# EAGLE board out-7.1+axp203 (EAGLE 6.0), part 1 of 3
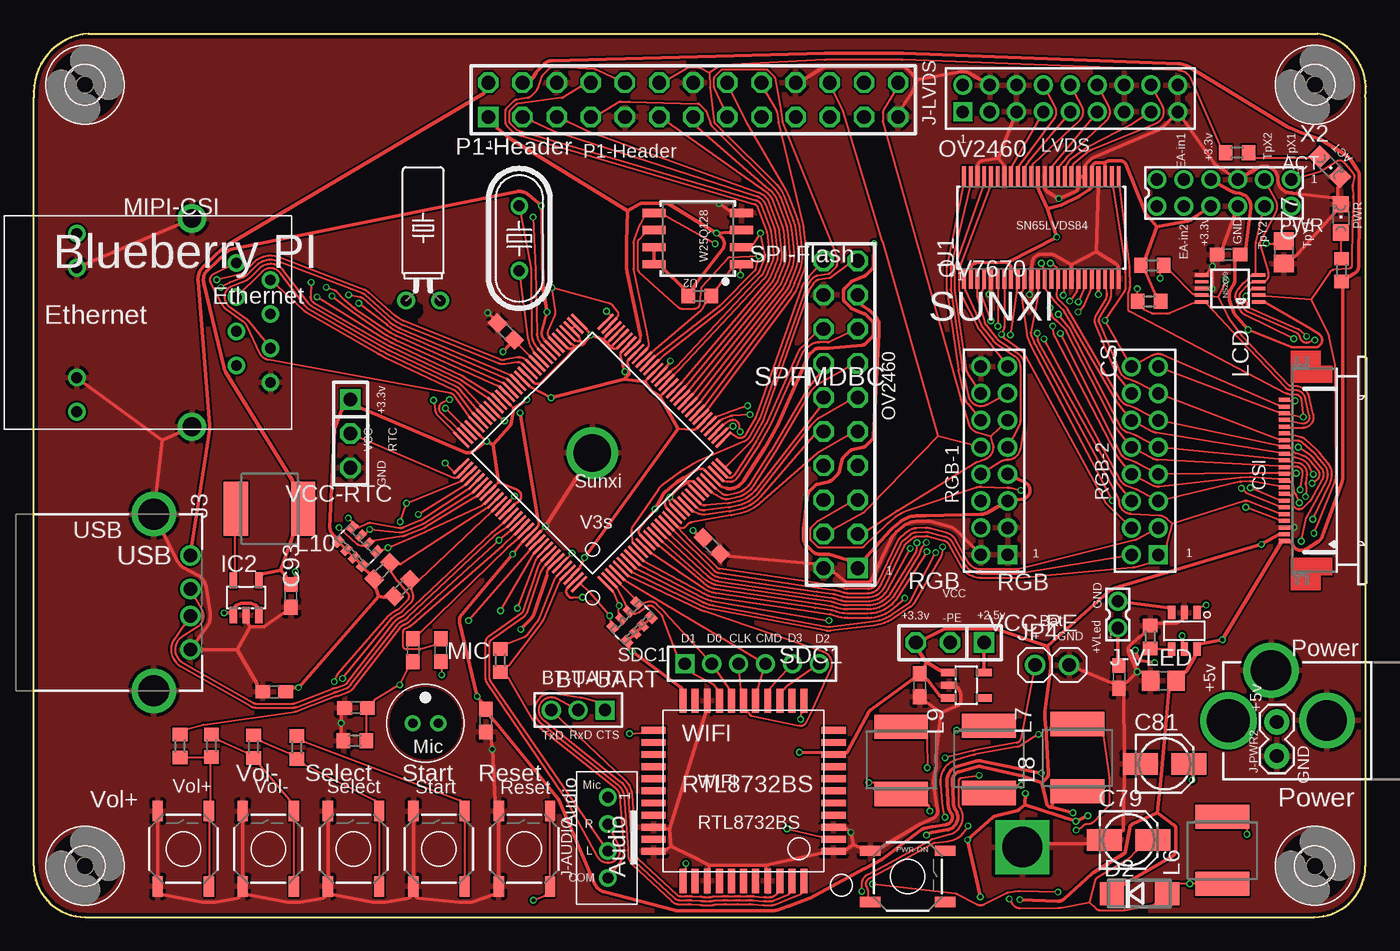
[diagram p0: board, top side]
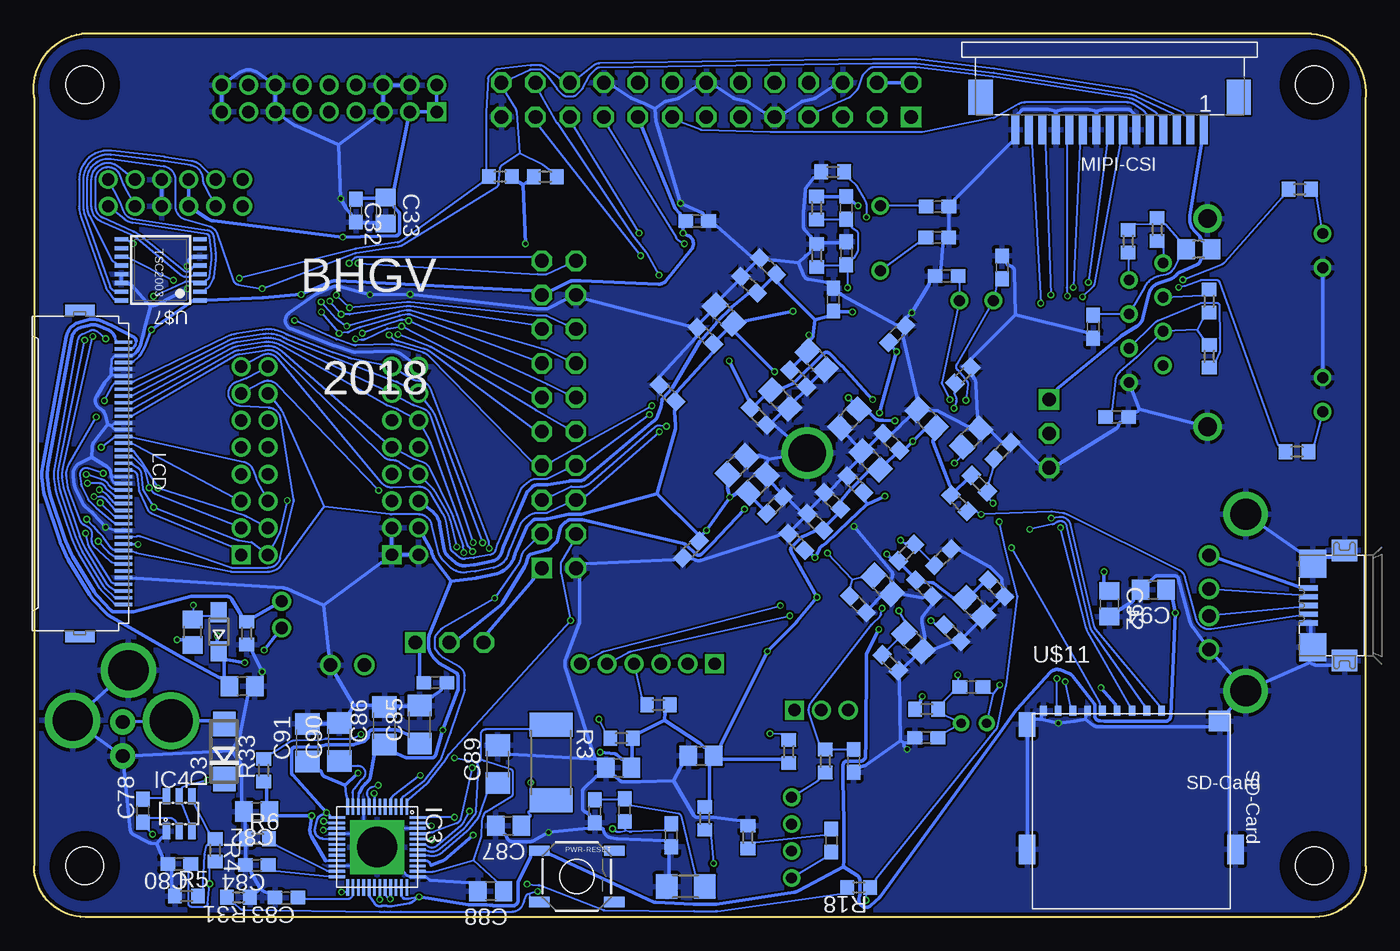
[diagram p1: board, bottom side, seen from below]

Size 99.11 x 65.7 mm. Coordinates in mm from the lower left corner, seen from the top.
Outline: 3.82,0 95.26,0 arc90 99.07,3.81 99.07,60.96 arc90 95.51,65.7 4.07,65.7 arc90 0.01,60.96 0.01,3.81 arc90 3.82,0
Copper layers 1+16: TOP 0.035mm / dielectric 0.15mm / BOTTOM 0.035mm
Design rules: minimum track width 0.1524mm, track to track 0.1524mm, copper to edge 0.254mm, minimum pad ring 0.1mm, minimum via ring 0.1mm
Net classes: 0 default_1: width 0.152 mm, clearance 0.152 mm; 1 default: width 0.152 mm, clearance 0.152 mm to class 0, clearance 0.152 mm; 2 pwr: width 0.178 mm, clearance 0.152 mm to class 0, clearance 0.3 mm to class 1, clearance 0.152 mm
tRestrict: area 26.6,44.3 to 28.9,46.1
vRestrict: area 26.6,44.3 to 28.9,46.1

## Footprints (pad centres in the part's own frame; a part is rotated, then mirrored left to right if it is on the bottom)
R1206 = smd 1.6 x 1.803: 1 -1.422,0; 2 1.422,0
C0603 = smd 1.1 x 1: 1 -0.85,0; 2 0.85,0
C0805 = smd 1.3 x 1.5: 1 -0.95,0; 2 0.95,0
C0805' = smd 1.3 x 1.5: 1 -0.85,0; 2 0.85,0
153CLV-0405 = smd 2.6 x 1.6: + 1.8,0; - -1.8,0
C1206 = smd 1.6 x 1.8: 1 -1.4,0; 2 1.4,0
SOD323-W = smd 1.5 x 1.2: A 1.45,0; C -1.45,0
DO214AC = smd 1.8 x 1.7: A 2.05,0; C -2.05,0
2,8 = hole 2.8: 0,0
SOT23-5L = smd 0.55 x 1.2: 1 -0.95,-1.3; 2 0,-1.3; 3 0.95,-1.3; 4 0.95,1.3; 5 -0.95,1.3
QFN48-6X6-H = smd 1.2 x 0.2: 1 -3,2.2; 2 -3,1.8; 3 -3,1.4; 4 -3,1; 5 -3,0.6; 6 -3,0.2; 7 -3,-0.2; 8 -3,-0.6; 9 -3,-1; 10 -3,-1.4; 11 -3,-1.8; 12 -3,-2.2; 25 3,-2.2; 26 3,-1.8; 27 3,-1.4; 28 3,-1; 29 3,-0.6; 30 3,-0.2; 31 3,0.2; 32 3,0.6; 33 3,1; 34 3,1.4; 35 3,1.8; 36 3,2.2 | smd 0.2 x 1.2: 13 -2.2,-3; 14 -1.8,-3; 15 -1.4,-3; 16 -1,-3; 17 -0.6,-3; 18 -0.2,-3; 19 0.2,-3; 20 0.6,-3; 21 1,-3; 22 1.4,-3; 23 1.8,-3; 24 2.2,-3; 37 2.2,3; 38 1.8,3; 39 1.4,3; 40 1,3; 41 0.6,3; 42 0.2,3; 43 -0.2,3; 44 -0.6,3; 45 -1,3; 46 -1.4,3; 47 -1.8,3; 48 -2.2,3 | drill 3 pad 4.016 square: P 0,0
SOT23-6L = smd 0.55 x 1.2: 1 -0.95,-1.3; 2 0,-1.3; 3 0.95,-1.3; 4 0.95,1.3; 5 0,1.3; 6 -0.95,1.3
USB-A-FEMALE = drill 1 pad 1.508: 1 -3.5,2.71; 2 -1,2.71; 3 1,2.71; 4 3.5,2.71 | drill 2.3 pad 3.316: P$1 6.57,0; P$2 -6.57,0
68611514122 = smd 0.6 x 2.2: 1 -7,2.4; 2 -6,2.4; 3 -5,2.4; 4 -4,2.4; 5 -3,2.4; 6 -2,2.4; 7 -1,2.4; 8 0,2.4; 9 1,2.4; 10 2,2.4; 11 3,2.4; 12 4,2.4; 13 5,2.4; 14 6,2.4; 15 7,2.4 | smd 1.8 x 2.6: Z1 -9.6,0; Z2 9.6,0
JST_B4B-PH_HEADER = drill 0.8 pad 1.308: P1 2.98,0.048; P2 0.98,0.048; P3 -1.02,0.048; P4 -3.02,0.048
52745-2290 = smd 0.3 x 0.8: 1 -5.25,2.5; 2 -4.75,2.5; 3 -4.25,2.5; 4 -3.75,2.5; 5 -3.25,2.5; 6 -2.75,2.5; 7 -2.25,2.5; 8 -1.75,2.5; 9 -1.25,2.5; 10 -0.75,2.5; 11 -0.25,2.5; 12 0.25,2.5; 13 0.75,2.5; 14 1.25,2.5; 15 1.75,2.5; 16 2.25,2.5; 17 2.75,2.5; 18 3.25,2.5; 19 3.75,2.5; 20 4.25,2.5; 21 4.75,2.5; 22 5.25,2.5
XF2H-4015-1LW = smd 1.3 x 0.25: 1 3.175,9.75; 2 3.175,9.25; 3 3.175,8.75; 4 3.175,8.25; 5 3.175,7.75; 6 3.175,7.25; 7 3.175,6.75; 8 3.175,6.25; 9 3.175,5.75; 10 3.175,5.25; 11 3.175,4.75; 12 3.175,4.25; 13 3.175,3.75; 14 3.175,3.25; 15 3.175,2.75; 16 3.175,2.25; 17 3.175,1.75; 18 3.175,1.25; 19 3.175,0.75; 20 3.175,0.25; 21 3.175,-0.25; 22 3.175,-0.75; 23 3.175,-1.25; 24 3.175,-1.75; 25 3.175,-2.25; 26 3.175,-2.75; 27 3.175,-3.25; 28 3.175,-3.75; 29 3.175,-4.25; 30 3.175,-4.75; 31 3.175,-5.25; 32 3.175,-5.75; 33 3.175,-6.25; 34 3.175,-6.75; 35 3.175,-7.25; 36 3.175,-7.75; 37 3.175,-8.25; 38 3.175,-8.75; 39 3.175,-9.25; 40 3.175,-9.75 | smd 2.2 x 0.8: M1 -0.075,12.15; M2 -0.075,-12.15
PINHEAD_2X09M = drill 0.914 pad 1.422 square: 1 -8,-1 | drill 0.914 pad 1.422: 2 -8,1; 3 -6,-1; 4 -6,1; 5 -4,-1; 6 -4,1; 7 -2,-1; 8 -2,1; 9 0,-1; 10 0,1; 11 2,-1; 12 2,1; 13 4,-1; 14 4,1; 15 6,-1; 16 6,1; 17 8,-1; 18 8,1
POWER_JACK_PTH_LOCK = drill 2.997 pad 4.115: GND 0.025,6.557; GNDBREAK 3.762,10.7 | drill 3.2 pad 4.216: PWR 0,13.878
1X02 = drill 1.016 pad 1.88: 1 0,0; 2 2.54,0
87758-0216 = drill 0.9 pad 1.408: 1 0,-1; 2 0,1
2X13 = drill 1.016 pad 1.524 square: 1 -15.24,-1.27 | drill 1.016 pad 1.524 octagon: 2 -15.24,1.27; 3 -12.7,-1.27; 4 -12.7,1.27; 5 -10.16,-1.27; 6 -10.16,1.27; 7 -7.62,-1.27; 8 -7.62,1.27; 9 -5.08,-1.27; 10 -5.08,1.27; 11 -2.54,-1.27; 12 -2.54,1.27; 13 0,-1.27; 14 0,1.27; 15 2.54,-1.27; 16 2.54,1.27; 17 5.08,-1.27; 18 5.08,1.27; 19 7.62,-1.27; 20 7.62,1.27; 21 10.16,-1.27; 22 10.16,1.27; 23 12.7,-1.27; 24 12.7,1.27; 25 15.24,-1.27; 26 15.24,1.27
1X06M = drill 0.914 pad 1.422 square: 1 -5,0 | drill 0.914 pad 1.422: 2 -3,0; 3 -1,0; 4 1,0; 5 3,0; 6 5,0
1X03 = drill 1.016 pad 1.524 square: 1 -2.54,0 | drill 1.016 pad 1.524 octagon: 2 0,0; 3 2.54,0
1X02' = drill 1.016 pad 1.524: 1 -1.27,0; 2 1.27,0
1X03M = drill 0.914 pad 1.422 square: 1 -2,0 | drill 0.914 pad 1.422: 2 0,0; 3 2,0
2X10 = drill 1.016 pad 1.524 square: 1 -11.43,-1.27 | drill 1.016 pad 1.524 octagon: 2 -11.43,1.27; 3 -8.89,-1.27; 4 -8.89,1.27; 5 -6.35,-1.27; 6 -6.35,1.27; 7 -3.81,-1.27; 8 -3.81,1.27; 9 -1.27,-1.27; 10 -1.27,1.27; 11 1.27,-1.27; 12 1.27,1.27; 13 3.81,-1.27; 14 3.81,1.27; 15 6.35,-1.27; 16 6.35,1.27; 17 8.89,-1.27; 18 8.89,1.27; 19 11.43,-1.27; 20 11.43,1.27
2X08M = drill 0.914 pad 1.422 square: 1 -7,-1 | drill 0.914 pad 1.422: 2 -7,1; 3 -5,-1; 4 -5,1; 5 -3,-1; 6 -3,1; 7 -1,-1; 8 -1,1; 9 1,-1; 10 1,1; 11 3,-1; 12 3,1; 13 5,-1; 14 5,1; 15 7,-1; 16 7,1
R0805 = smd 1.3 x 1.5: 1 -0.95,0; 2 0.95,0
L5650M = smd 1.8 x 4: 1 -2.5,0; 2 2.5,0
CHIPLED_0805 = smd 1.2 x 1.2: A 0,-1.05; C 0,1.05
F6035AP = drill 0.7 pad 1.208: 1 0,0.95; 2 0,-0.95
TACTILE-SWITCH-SMD = smd 1.524 x 0.762: 1 -2.794,1.905; 2 2.794,1.905; 3 -2.794,-1.905; 4 2.794,-1.905
HC49U-V = drill 0.813 pad 1.321: 1 -2.413,0; 2 2.413,0
TC38H = drill 0.813 pad 1.321: 1 -1.27,0; 2 1.27,0
R0603 = smd 1 x 1.1: 1 -0.85,0; 2 0.85,0
R2512 = smd 1.8 x 3.2: 1 -2.8,0; 2 2.8,0
EXB38V = smd 0.6 x 0.8: 1 -1.275,-0.75; 4 1.275,-0.75; 5 1.275,0.75; 8 -1.275,0.75 | smd 0.5 x 0.8: 2 -0.4,-0.75; 3 0.4,-0.75; 6 0.4,0.75; 7 -0.4,0.75
SPARKFUN-SWITCHES_TACTILE_SWITCH_SMD_5.2MM = smd 1.524 x 0.762: 1 -2.794,1.905; 2 2.794,1.905; 3 -2.794,-1.905; 4 2.794,-1.905
TFSOP-48-6.1MM = smd 1.5 x 0.29: 1 -3.8,5.75; 2 -3.8,5.25; 3 -3.8,4.75; 4 -3.8,4.25; 5 -3.8,3.75; 6 -3.8,3.25; 7 -3.8,2.75; 8 -3.8,2.25; 9 -3.8,1.75; 10 -3.8,1.25; 11 -3.8,0.75; 12 -3.8,0.25; 13 -3.8,-0.25; 14 -3.8,-0.75; 15 -3.8,-1.25; 16 -3.8,-1.75; 17 -3.8,-2.25; 18 -3.8,-2.75; 19 -3.8,-3.25; 20 -3.8,-3.75; 21 -3.8,-4.25; 22 -3.8,-4.75; 23 -3.8,-5.25; 24 -3.8,-5.75; 25 3.8,-5.75; 26 3.8,-5.25; 27 3.8,-4.75; 28 3.8,-4.25; 29 3.8,-3.75; 30 3.8,-3.25; 31 3.8,-2.75; 32 3.8,-2.25; 33 3.8,-1.75; 34 3.8,-1.25; 35 3.8,-0.75; 36 3.8,-0.25; 37 3.8,0.25; 38 3.8,0.75; 39 3.8,1.25; 40 3.8,1.75; 41 3.8,2.25; 42 3.8,2.75; 43 3.8,3.25; 44 3.8,3.75; 45 3.8,4.25; 46 3.8,4.75; 47 3.8,5.25; 48 3.8,5.75
SOIC-8 = smd 0.61 x 1.702: 1 -1.905,-3.251; 2 -0.635,-3.251; 3 0.635,-3.251; 4 1.905,-3.251; 5 1.905,3.251; 6 0.635,3.251; 7 -0.635,3.251; 8 -1.905,3.251
QFP-128 = smd 0.2 x 1.6: 1 -6.2,-7.6; 2 -5.8,-7.6; 3 -5.4,-7.6; 4 -5,-7.6; 5 -4.6,-7.6; 6 -4.2,-7.6; 7 -3.8,-7.6; 8 -3.4,-7.6; 9 -3,-7.6; 10 -2.6,-7.6; 11 -2.2,-7.6; 12 -1.8,-7.6; 13 -1.4,-7.6; 14 -1,-7.6; 15 -0.6,-7.6; 16 -0.2,-7.6; 17 0.2,-7.6; 18 0.6,-7.6; 19 1,-7.6; 20 1.4,-7.6; 21 1.8,-7.6; 22 2.2,-7.6; 23 2.6,-7.6; 24 3,-7.6; 25 3.4,-7.6; 26 3.8,-7.6; 27 4.2,-7.6; 28 4.6,-7.6; 29 5,-7.6; 30 5.4,-7.6; 31 5.8,-7.6; 32 6.2,-7.6; 65 6.2,7.6; 66 5.8,7.6; 67 5.4,7.6; 68 5,7.6; 69 4.6,7.6; 70 4.2,7.6; 71 3.8,7.6; 72 3.4,7.6; 73 3,7.6; 74 2.6,7.6; 75 2.2,7.6; 76 1.8,7.6; 77 1.4,7.6; 78 1,7.6; 79 0.6,7.6; 80 0.2,7.6; 81 -0.2,7.6; 82 -0.6,7.6; 83 -1,7.6; 84 -1.4,7.6; 85 -1.8,7.6; 86 -2.2,7.6; 87 -2.6,7.6; 88 -3,7.6; 89 -3.4,7.6; 90 -3.8,7.6; 91 -4.2,7.6; 92 -4.6,7.6; 93 -5,7.6; 94 -5.4,7.6; 95 -5.8,7.6; 96 -6.2,7.6 | smd 1.6 x 0.2: 33 7.6,-6.2; 34 7.6,-5.8; 35 7.6,-5.4; 36 7.6,-5; 37 7.6,-4.6; 38 7.6,-4.2; 39 7.6,-3.8; 40 7.6,-3.4; 41 7.6,-3; 42 7.6,-2.6; 43 7.6,-2.2; 44 7.6,-1.8; 45 7.6,-1.4; 46 7.6,-1; 47 7.6,-0.6; 48 7.6,-0.2; 49 7.6,0.2; 50 7.6,0.6; 51 7.6,1; 52 7.6,1.4; 53 7.6,1.8; 54 7.6,2.2; 55 7.6,2.6; 56 7.6,3; 57 7.6,3.4; 58 7.6,3.8; 59 7.6,4.2; 60 7.6,4.6; 61 7.6,5; 62 7.6,5.4; 63 7.6,5.8; 64 7.6,6.2; 97 -7.6,6.2; 98 -7.6,5.8; 99 -7.6,5.4; 100 -7.6,5; 101 -7.6,4.6; 102 -7.6,4.2; 103 -7.6,3.8; 104 -7.6,3.4; 105 -7.6,3; 106 -7.6,2.6; 107 -7.6,2.2; 108 -7.6,1.8; 109 -7.6,1.4; 110 -7.6,1; 111 -7.6,0.6; 112 -7.6,0.2; 113 -7.6,-0.2; 114 -7.6,-0.6; 115 -7.6,-1; 116 -7.6,-1.4; 117 -7.6,-1.8; 118 -7.6,-2.2; 119 -7.6,-2.6; 120 -7.6,-3; 121 -7.6,-3.4; 122 -7.6,-3.8; 123 -7.6,-4.2; 124 -7.6,-4.6; 125 -7.6,-5; 126 -7.6,-5.4; 127 -7.6,-5.8; 128 -7.6,-6.2 | drill 2.8 pad 3.816: P$1 0,0
LGA = smd 1.8 x 0.51: P$1 -0.7,10.5; P$2 -0.7,9.6; P$3 -0.7,8.7; P$4 -0.7,7.8; P$5 -0.7,6.9; P$6 -0.7,6; P$7 -0.7,5.1; P$8 -0.7,4.2; P$9 -0.7,3.3; P$10 -0.7,2.4; P$11 -0.7,1.5; P$23 12.7,1.5; P$24 12.7,2.4; P$25 12.7,3.3; P$26 12.7,4.2; P$27 12.7,5.1; P$28 12.7,6; P$29 12.7,6.9; P$30 12.7,7.8; P$31 12.7,8.7; P$32 12.7,9.6; P$33 12.7,10.5 | smd 0.51 x 1.8: P$12 1.5,-0.7; P$13 2.4,-0.7; P$14 3.3,-0.7; P$15 4.2,-0.7; P$16 5.1,-0.7; P$17 6,-0.7; P$18 6.9,-0.7; P$19 7.8,-0.7; P$20 8.7,-0.7; P$21 9.6,-0.7; P$22 10.5,-0.7; P$34 10.5,12.7; P$35 9.6,12.7; P$36 8.7,12.7; P$37 7.8,12.7; P$38 6.9,12.7; P$39 6,12.7; P$40 5.1,12.7; P$41 4.2,12.7; P$42 3.3,12.7; P$43 2.4,12.7; P$44 1.5,12.7
RJ45 = drill 0.8 pad 1.308: 1 -6.03,-4.12; 2 -8.57,-2.86; 3 -6.03,-1.58; 4 -8.57,-0.32; 5 -6.03,0.96; 6 -8.57,2.22; 7 -6.03,3.5; 8 -8.57,4.76; 9 5.84,-6.305; 10 5.84,-3.765; 11 5.84,4.405; 12 5.84,6.945 | drill 1.4 pad 2.1: SHIELD1 -2.73,-7.425; SHIELD2 -2.73,8.065
ZX62R-B-5P = smd 1.35 x 0.4: 1 2.675,-1.3; 2 2.675,-0.65; 3 2.675,0; 4 2.675,0.65; 5 2.675,1.3 | smd 1.9 x 1.6: M1 0,-4.1; M2 0,4.1 | smd 2 x 2.1: M3 2.35,3.1; M4 2.35,-3.1
SOT25 = smd 0.55 x 1.2: 1 -0.95,-1.3; 2 0,-1.3; 3 0.95,-1.3; 4 0.95,1.3; 5 -0.95,1.3
TSSOP16 = smd 0.305 x 0.991: 1 -2.275,-2.918; 2 -1.625,-2.918; 3 -0.975,-2.918; 4 -0.325,-2.918; 5 0.325,-2.918; 6 0.975,-2.918; 7 1.625,-2.918; 8 2.275,-2.918; 9 2.275,2.918; 10 1.625,2.918; 11 0.975,2.918; 12 0.325,2.918; 13 -0.325,2.918; 14 -0.975,2.918; 15 -1.625,2.918; 16 -2.275,2.918
MSOP10 = smd 0.25 x 1: 1 -1,-2.113; 2 -0.5,-2.113; 3 0,-2.113; 4 0.5,-2.113; 5 1,-2.113; 6 1,2.113; 7 0.5,2.113; 8 0,2.113; 9 -0.5,2.113; 10 -1,2.113
SOT23-6 = smd 1 x 0.55: 1 -1.35,0.95; 2 -1.35,0; 3 -1.35,-0.95; 4 1.35,-0.95; 5 1.35,0; 6 1.35,0.95
MICROSD-PUSH-OUT = smd 0.5 x 0.75: 1 9.625,0.225; 2 8.525,0.225; 3 7.425,0.225; 4 6.325,0.225; 5 5.225,0.225; 6 4.125,0.225; 7 3.025,0.225; 8 1.925,0.225; CD 0.825,0.225 | smd 1.2 x 1.8: G1 -0.375,-0.8 | smd 1.2 x 2.2: G2 -0.375,-10.1; G4 15.125,-10.1 | smd 1.6 x 1.5: G3 13.95,-0.55
87758-1216 = drill 0.9 pad 1.408: 1 -5,-1; 2 -5,1; 3 -3,-1; 4 -3,1; 5 -1,-1; 6 -1,1; 7 1,-1; 8 1,1; 9 3,-1; 10 3,1; 11 5,-1; 12 5,1

## Placement (x,y rotation side)
ANT1  [R1206]  50.6,2.28 0 bottom
C1  100nF  [C0603]  49.74,51.77 0 bottom
C2  100nF  [C0603]  88.89,49.26 180 top
C3  10µF  [C0805]  55.59,11.1 180 bottom
C4  1µF  [C0603]  55.14,7.96 90 bottom
C5  1µF  [C0603]  51.69,6.09 270 bottom
C6  1µF  [C0603]  57.36,7.88 270 bottom
C7  10µF  [C0805]  29.38,35.66 45 bottom
C8  18pF  [C0603]  27.07,48.31 90 bottom
C9  100nF  [C0603]  17.9,16.76 180 top
C10  18pF  [C0603]  31.19,47.67 180 bottom
C11  18pF  [C0603]  31.86,52.83 180 bottom
C12  18pF  [C0603]  31.89,50.54 180 bottom
C13  1µF  [C0603]  27.05,34.68 45 bottom
C14  100nF  [C0603]  38.67,52.74 90 bottom
C15  100nF  [C0603]  38.65,49.37 270 bottom
C16  10µF  [C0805]  29.13,23.06 135 bottom
C17  1µF  [C0603]  38.11,11.62 270 bottom
C18  100nF  [C0603]  39.76,5.7 270 bottom
C19  100nF  [C0603]  27.49,24.46 135 bottom
C20  10µF  [C0805]  33.66,20.45 135 bottom
C21  1µF  [C0603]  30.75,21.11 135 bottom
C22  100nF  [C0603]  37.77,23.25 315 bottom
C23  33pF  [C0603]  32.7,13.34 0 bottom
C24  33pF  [C0603]  23.98,15.56 0 top
C25  100pF  [C0603]  29.34,17.11 180 bottom
C26  33pF  [C0603]  33.64,14.62 90 top
C27  100nF  [C0603]  30.3,19.85 270 top
C28  100nF  [C0603]  28.23,19.84 270 top
C29  10µF  [C0805]  35.95,24.71 135 bottom
C30  10µF  [C0805]  49.45,11.99 180 bottom
C31  100nf  [C0603]  65.92,17.24 270 top
C32  1µF  [C0603]  75.12,52.54 270 bottom
C33  10µF  [C0805]  72.92,52.55 270 bottom
C34  1nF  [C0603]  31.48,26.76 225 bottom
C38  10µF  [C0603]  45.89,47.04 315 bottom
C39  1µF  [C0603]  42.23,40.05 315 bottom
C47  1µF  [C0603]  44.47,48.41 135 bottom
C48  100nF  [C0603]  18.51,37.19 0 bottom
C49  100nF  [C0603]  20.29,43.9 270 bottom
C50  100nF  [C0805]  40.86,41.4 315 bottom
C51  100nF  [C0603]  39.61,45.92 90 bottom
C52  100nF  [C0805]  47.75,44.81 135 bottom
C53  100nF  [C0603]  49.14,43.23 135 bottom
C54  1µF  [C0805]  45.27,32.21 45 bottom
C55  1µF  [C0603]  50.45,27.61 315 top
C56  10µF  [C0603]  42.37,27.9 135 bottom
C57  100nF  [C0603]  40.95,29.39 135 bottom
C58  100nF  [C0603]  35.29,35.33 135 bottom
C59  1µF  [C0805]  36.84,33.96 135 bottom
C60  10µF  [C0603]  39.67,30.95 135 bottom
C61  1µF  [C0805]  43.58,38.5 315 bottom
C62  100nF  [C0603]  37.98,32.19 135 bottom
C63  100nF  [C0805]  46.78,33.6 45 bottom
C64  1µF  [C0603]  51.96,38.96 135 bottom
C65  1µF  [C0603]  43.96,30.63 45 bottom
C66  10µF  [C0805]  38.42,37.07 225 bottom
C67  100nF  [C0603]  50.2,27.33 225 bottom
C68  100nF  [C0603]  32.86,24.45 315 bottom
C69  100nF  [C0805]  32.68,37.06 135 bottom
C70  100nF  [C0603]  45.19,37.23 315 bottom
C71  10µF  [C0603]  34.87,43.36 45 bottom
C72  100nF  [C0603]  35.12,43.55 135 top
C73  10µF  [C0805]  84.04,17.58 180 top
C74  10µF  [C0805]  83.6,17.17 0 bottom
C75  100nf  [C0603]  80.73,17.86 270 top
C76  100nf  [C0603]  69.23,17.43 0 bottom
C77  [C0805']  93.01,49.44 270 top
C78  100n  [C0603]  90.98,7.91 90 bottom
C79  220u  [153CLV-0405]  81.45,5.74 0 top
C80  100n  [C0603]  88.27,3.96 180 bottom
C81  47u/25V  [153CLV-0405]  84.13,11.4 0 top
C82  10u  [C0805]  82.52,7.85 180 bottom
C83  100n  [C0603]  80.31,1.44 180 bottom
C84  100n  [C0603]  82.5,3.86 180 bottom
C85  47u  [C1206]  70.39,14.32 90 bottom
C86  47u  [C1206]  73.01,14.24 90 bottom
C87  10u  [C0805]  63.79,6.78 180 bottom
C88  10u  [C0805]  65.1,1.93 180 bottom
C89  47u  [C1206]  64.58,11.38 90 bottom
C90  47u  [C1206]  76.36,13.02 90 bottom
C91  47u  [C1206]  78.74,12.96 90 bottom
C92  10u  [C0805]  19.09,23.29 270 bottom
C93  100n  [C0603]  19.14,23.89 270 top
C94  10u  [C0805]  15.82,24.35 180 bottom
D1  [SOD323-W]  85.33,21.22 90 bottom
D2  SS14  [DO214AC]  82.26,1.74 0 top
D3  SS34  [DO214AC]  84.92,12.32 90 bottom
H1  [2,8]  95.31,3.81 0 top
H2  [2,8]  3.82,3.81 0 top
H3  [2,8]  3.82,61.9 0 top
H4  [2,8]  95.31,61.9 0 top
IC2  LM3671MF-1.8  [SOT23-5L]  15.81,23.76 0 top
IC3  AXP203H  [QFN48-6X6-H]  73.55,5.21 270 bottom
IC4  TPS562200DBV  [SOT23-6L]  88.28,7.7 0 bottom
J3  USB-A-FEMALE  [USB-A-FEMALE]  8.95,23.39 270 top
J4  [68611514122]  19.06,60.96 180 bottom
J-AUDIO  JST-PH_4-PIN_HEADER  [JST_B4B-PH_HEADER]  42.77,5.93 90 top
J-CAM-FFC  52745-2290  [52745-2290]  95.54,33.22 90 top
J-LCD-FFC  [XF2H-4015-1LW]  95.59,33 0 bottom
J-LVDS  [PINHEAD_2X09M]  77.12,60.88 0 top
J-PWR  POWER_JACKPTH_LOCK  [POWER_JACK_PTH_LOCK]  102.76,14.6 90 top
J-PWR2  [1X02]  92.48,11.97 90 top
J-VLED  87758-0216  [87758-0216]  80.66,22.5 0 top
JP1  [2X13]  49.07,60.78 0 top
JP2  [1X06M]  53.45,18.84 0 top
JP3  [1X03]  68.17,20.41 180 top
JP4  [1X02']  75.76,18.75 0 top
JP5  [1X03]  23.57,35.95 270 top
JP7  [1X03M]  40.51,15.4 180 top
JP10  OV2640  [2X10]  60.03,37.38 90 top
JP11  [2X08M]  82.67,33.94 90 top
JP12  [2X08M]  71.46,33.94 90 top
L1  2,2µH  [R0805]  87.29,21.2 90 bottom
L2  10µH  [R0805]  12.43,49.66 180 bottom
L6  4.7u  [L5650M]  88.43,4.97 90 top
L7  4.7u  [L5650M]  71.06,11.73 270 top
L8  4.7u  [L5650M]  77.65,11.86 90 top
L9  4.7u  [L5650M]  64.53,11.66 270 top
L10  4.7u  [L5650M]  17.56,30.37 180 top
LED1  [CHIPLED_0805]  97.25,51.96 0 top
LED2  [CHIPLED_0805]  96.42,55.8 225 top
MIC  [F6035AP]  29.15,14.41 90 top
PWR-ON  Power  [TACTILE-SWITCH-SMD]  65.03,3.02 0 top
PWR-RESET  Power  [TACTILE-SWITCH-SMD]  58.7,3.03 0 bottom
Q1  24Mhz  [HC49U-V]  36.13,50.47 270 top
Q2  32kHz  [TC38H]  28.98,45.85 0 top
R1  47k  [R0603]  25.93,25.74 225 top
R2  47k  [R0603]  27.42,24.48 225 top
R3  30m  [R2512]  60.63,11.5 270 bottom
R4  11k  [R0603]  85.6,4.97 270 bottom
R5  2k  [R0603]  87.73,1.57 0 bottom
R6  200k  [R0603]  82.45,5.84 0 bottom
R8  10k  [R0603]  49.54,46.18 0 top
R9  100k  [R0603]  55.37,13.3 180 bottom
R10  100k  [R0603]  49.18,7.35 90 bottom
R11  47k  [R0603]  28.75,32.24 135 bottom
R12  240 - 1%  [R0603]  39.66,55.42 180 bottom
R13  2k - 1%  [R0603]  40.86,52.73 90 bottom
R14  2k - 1%  [R0603]  40.85,49.2 270 bottom
R15  22  [R0603]  45.97,5.94 270 bottom
R16  1k  [R0603]  97.3,48.11 270 top
R17  1k  [R0603]  89.52,56.85 180 top
R18  [R0603]  37.72,2.21 180 bottom
R19  10k  [R0603]  42.93,12.31 270 bottom
R20  6k8  [R0603]  10.89,12.72 90 top
R21  8k2  [R0603]  13.23,12.75 270 top
R22  10k  [R0603]  16.36,12.67 270 top
R23  11k  [R0603]  19.58,12.62 270 top
R24  6k 1%  [R0603]  29.97,40.29 45 bottom
R25  2k  [R0603]  40.22,11.6 90 bottom
R26  0  [R0603]  34.71,19.09 270 top
R27  200k 1%  [R0603]  35.38,18.91 135 bottom
R28  2k  [R0603]  23.9,13.12 180 top
R29  47k  [R0603]  34.18,27.11 225 bottom
R30  2k  [R0603]  32.67,15.46 180 bottom
R31  4.7k  [R0603]  83.87,1.47 180 bottom
R32  47k  [R0603]  30.25,30.79 315 bottom
R33  4.7k  [R0603]  81.99,10.92 90 bottom
R36  47k  [R0603]  52.63,15.78 180 bottom
R38  10k  [R0603]  82.99,45.79 180 top
R39  10k  [R0603]  83.22,48.47 0 top
R40  49.9  [R0603]  11.67,45.81 270 bottom
R41  49.9  [R0603]  11.65,41.71 90 bottom
R42  49.9  [R0603]  15.53,51.12 90 bottom
R43  49.9  [R0603]  17.69,50.26 90 bottom
R44  10k  [R0603]  61.05,55.05 0 bottom
R45  10k  [R0603]  64.4,55.07 180 bottom
R46  10k  [R0603]  83.06,20.83 90 top
R47  [R0603]  83.26,21.11 270 bottom
R52  1k  [R0603]  5.12,34.61 0 bottom
R53  1k  [R0603]  4.92,54.12 0 bottom
RN1  [EXB38V]  44.51,21.92 45 top
RN2  [EXB38V]  24.09,27.56 315 top
S-RST  [SPARKFUN-SWITCHES_TACTILE_SWITCH_SMD_5.2MM]  36.5,5.08 90 top
S-SEL  [SPARKFUN-SWITCHES_TACTILE_SWITCH_SMD_5.2MM]  23.8,5.08 90 top
S-START  [SPARKFUN-SWITCHES_TACTILE_SWITCH_SMD_5.2MM]  30.15,5.08 90 top
S-VOL+  [SPARKFUN-SWITCHES_TACTILE_SWITCH_SMD_5.2MM]  11.15,5.08 90 top
S-VOL-  [SPARKFUN-SWITCHES_TACTILE_SWITCH_SMD_5.2MM]  17.45,5.08 90 top
U1  SN65LVDS84AQDGGRQ1  [TFSOP-48-6.1MM]  74.96,51.27 90 top
U2  W25Q32FV  [SOIC-8]  49.41,50.46 90 top
U$1  [QFP-128]  41.57,34.52 45 top
U$2  [LGA]  58.81,15.39 180 top
U$3  [RJ45]  9.05,44.52 180 top
U$5  [ZX62R-B-5P]  1.59,23.17 180 bottom
U$6  XC6204  [SOT25]  69.38,17.24 270 top
U$7  TSC2003  [TSSOP16]  89.66,48.13 90 bottom
U$8  NS2009  [MSOP10]  89,46.75 90 top
U$9  [SOT23-6]  85.6,21.29 270 top
U$11  MICROSD-PUSH-OUT  [MICROSD-PUSH-OUT]  24.82,15.13 0 bottom
X2  87758-1216  [87758-1216]  88.57,53.85 180 top

## Library data of the parts
ANT1 C1-C34 C38 C39 C47-C76 C78-C94 L1 L2 L6-L10 R1-R6 R8-R33 R36 R38-R47 R52 R53 = rcl
C77 = resistor
D1-D3 = diode
H1 H2 H4 = holes
H3 = holes@1
IC2-IC4 U$1 = Allwinner V3s
J3 = Connectors
J4 = EAGLE-FPC_CONNECTOR_AND_FFC_CAB-rev16b
J-AUDIO = srg
J-CAM-FFC = con-molex; OC_FARNELL: unknown; OC_NEWARK: unknown
J-LCD-FFC = adafruit
J-LVDS = Blueberry Pi
J-PWR = SparkFun-Connectors; PROD_ID: CONN-08197; SF_ID: PRT-00119
J-PWR2 = SparkFun-Connectors
J-VLED = con-molex; MPN: 87758-0216; OC_FARNELL: unknown; OC_NEWARK: 94M1513
JP1 JP3-JP5 JP7 JP10-JP12 = pinhead
JP2 = pinhead-1
LED1 LED2 = led
MIC = microphon
PWR-ON PWR-RESET = SparkFun-Electromechanical; PROD_ID: SWCH-08247
Q1 = crystal; OC_FARNELL: 1666969; OC_NEWARK: unknown
Q2 = crystal; OC_FARNELL: unknown; OC_NEWARK: unknown
RN1 RN2 = resistor-dil; OC_FARNELL: unknown; OC_NEWARK: unknown
S-RST S-SEL S-START S-VOL+ S-VOL- = Blueberry Pi; PROD_ID: SWCH-08247; SF_SKU: COM-08720
U1 = TI
U2 = SparkFun-IC-Memory; PROD_ID: IC-13229
U$2 = RTL8723BS_Modul
U$3 = HR911105A
U$5 = con-hirose
U$6 = XC6204
U$7 = tsc2003
U$8 = NS2009
U$9 = PT4101
U$11 = microsd
X2 = con-molex; MPN: 87758-1216; OC_FARNELL: unknown; OC_NEWARK: 25M5671

## Nets
!IRQ [default]: IC3.48 R33.2
!RESET: C13.1 R11.1 R18.1 S-RST.3 S-RST.4 U$1.99
!VBUSEN [default]: IC3.6
+1V2 [pwr]: C52.1 C53.1 C54.1 C55.1 C56.1 C62.1 C63.1 C64.1 C65.1 C66.1 C67.1 C86.1 IC3.10 JP12.4 L7.1 U$1.19 U$1.20 U$1.21 U$1.25 U$1.26 U$1.38 U$1.47 U$1.51 U$1.56 U$1.58 U$1.64 U$1.80 U$1.88 U$1.108 U$1.126
+1V8 [pwr]: C14.2 C38.2 C39.1 C47.1 C50.1 C51.1 C92.1 C93.1 IC2.4 JP12.6 L10.1 R13.2 U$1.59 U$1.60 U$1.61 U$1.62 U$1.65 U$1.66 U$1.67 U$1.68 U$1.69 U$1.70 U$1.72 U$1.79
+2V5 [pwr]: C76.1 JP3.1 U$6.5
+3V3 [pwr]: C1.1 C2.1 C3.1 C9.1 C30.1 C31.1 C32.1 C33.1 C57.1 C58.1 C59.1 C60.1 C61.1 C69.1 C70.1 C85.1 IC3.13 IC3.17 IC3.40 J4.1 J-CAM-FFC.2 J-LCD-FFC.4 J-LCD-FFC.31 J-LVDS.1 J-LVDS.2 J-LVDS.3 JP1.1 JP1.17 JP3.3 JP5.1 JP10.1 JP10.17 JP12.5 JP12.7 L2.1 L8.1 R1.2 R2.2 R8.1 R9.1 R10.2 R11.2 R19.2 R32.1 R36.1 R38.1 R39.1 RN1.1 RN1.2 RN1.3 RN1.4 RN2.1 RN2.2 RN2.3 RN2.4 U1.2 U1.8 U1.21 U1.27 U1.29 U1.37 U2.3 U2.7 U2.8 U$1.50 U$1.57 U$1.85 U$1.93 U$1.104 U$1.109 U$1.127 U$2.P$9 U$2.P$22 U$6.1 U$6.3 U$7.1 U$8.1 U$11.4 X2.7 X2.8
+3V3A [pwr]: C16.2 C19.2 C26.2 C68.1 C71.1 C72.1 C91.1 IC3.12 R29.2 R30.2 U$1.76 U$1.115
+5V [pwr]: C73.1 D2.C IC3.31 J3.1 J-CAM-FFC.1 JP1.2 JP1.4 L1.1 R16.2 U$5.1 U$9.6
BT_H_WK [default]: U$2.P$7
BT_WK [default]: U$2.P$6
CLK_N [default]: J-LVDS.15 U1.33
CLK_P [default]: J-LVDS.16 U1.32
CSI_D0/LCD_D2 [default]: J-CAM-FFC.14 J-LCD-FFC.23 JP10.20 JP11.12 U1.13 U$1.33
CSI_D1/LCD_D3 [default]: J-CAM-FFC.15 J-LCD-FFC.24 JP10.19 JP11.11 U1.15 U$1.32
CSI_D2/LCD_D4 [default]: J-CAM-FFC.12 J-LCD-FFC.25 JP10.16 JP11.10 U1.16 U$1.31
CSI_D3/LCD_D5 [default]: J-CAM-FFC.13 J-LCD-FFC.26 JP10.15 JP11.9 U1.18 U$1.30
CSI_D4/LCD_D6 [default]: J-CAM-FFC.10 J-LCD-FFC.27 JP10.14 JP11.8 U1.19 U$1.28
CSI_D5/LCD_D7 [default]: J-CAM-FFC.11 J-LCD-FFC.28 JP10.13 JP11.7 U1.20 U$1.27
CSI_D6/LCD_D10 [default]: J-CAM-FFC.8 J-LCD-FFC.15 JP10.12 JP11.6 U1.4 U$1.24
CSI_D7/LCD_D11 [default]: J-CAM-FFC.9 J-LCD-FFC.16 JP10.11 JP11.5 U1.6 U$1.23
CSI_D8/LCD_D12 [default]: J-CAM-FFC.6 J-LCD-FFC.17 JP10.10 JP11.4 U1.7 U$1.22
CSI_D9/LCD_D13 [default]: J-CAM-FFC.7 J-LCD-FFC.18 JP10.9 JP11.3 U1.9 U$1.18
CSI_D10/LCD_D14 [default]: J-CAM-FFC.4 J-LCD-FFC.19 JP11.2 U1.10 U$1.17
CSI_D11/LCD_D15 [default]: J-CAM-FFC.5 J-LCD-FFC.20 JP11.1 U1.12 U$1.16
CSI_D12/LCD_D18 [default]: J-CAM-FFC.22 J-LCD-FFC.7 JP12.15 U1.44 U$1.15
CSI_HSYNC/LCD_HSYNC [default]: J-CAM-FFC.17 J-LCD-FFC.32 JP10.6 JP11.14 U1.22 U$1.35
CSI_MCLK/LCD_DE [default]: J-CAM-FFC.20 J-LCD-FFC.34 JP10.8 JP11.15 U1.25 U$1.36
CSI_PCLK/LCD_CLK [default]: J-CAM-FFC.21 J-LCD-FFC.30 JP10.7 JP11.16 U1.26 U$1.37
CSI_VSYNC/LCD_VSYNC [default]: J-CAM-FFC.16 J-LCD-FFC.33 JP10.5 JP11.13 U1.23 U$1.34
EA-IN1 [default]: U$7.16 X2.9
EA-IN2 [default]: U$7.15 X2.10
EPHY_RXN [default]: R41.1 U$1.89 U$3.6
EPHY_RXP [default]: R40.1 U$1.90 U$3.3
EPHY_TXN [default]: R43.1 U$1.91 U$3.2
EPHY_TXP [default]: R42.1 U$1.92 U$3.1
GND [pwr]: ANT1.1 C1.2 C2.2 C3.2 C5.2 C6.2 C7.2 C8.2 C9.2 C10.2 C11.1 C12.1 C13.2 C15.1 C16.1 C17.2 C19.1 C20.1 C21.1 C22.2 C23.1 C24.1 C26.1 C29.1 C30.2 C31.2 C32.2 C33.2 C34.1 C38.1 C39.2 C47.2 C48.2 C49.2 C50.2 C51.2 C52.2 C53.2 C54.2 C55.2 C56.2 C57.2 C58.2 C59.2 C60.2 C61.2 C62.2 C63.2 C64.2 C65.2 C66.2 C67.2 C68.2 C69.2 C70.2 C71.2 C72.2 C73.2 C74.2 C75.2 C76.2 C77.2 C79.- C80.2 C81.- C82.2 C83.2 C84.2 C85.2 C86.2 C87.2 C88.2 C89.2 C90.2 C91.2 C92.2 C93.2 C94.2 IC2.2 IC3.9 IC3.16 IC3.22 IC3.37 IC3.46 IC3.P IC4.1 J3.4 J3.P$1 J3.P$2 J4.6 J4.9 J4.12 J4.15 J-CAM-FFC.3 J-LCD-FFC.3 J-LCD-FFC.5 J-LCD-FFC.6 J-LCD-FFC.13 J-LCD-FFC.14 J-LCD-FFC.21 J-LCD-FFC.22 J-LCD-FFC.29 J-LCD-FFC.36 J-LVDS.4 J-LVDS.5 J-LVDS.6 J-LVDS.13 J-LVDS.14 J-LVDS.17 J-LVDS.18 J-PWR2.1 J-PWR.GND J-PWR.GNDBREAK JP1.6 JP1.9 JP1.14 JP1.20 JP1.25 JP4.2 JP5.3 JP10.2 JP10.18 JP12.1 JP12.2 JP12.3 JP12.16 LED1.C LED2.C PWR-ON.1 R5.1 R6.1 R12.2 R14.1 R15.1 R24.2 R27.1 R28.2 R31.1 R46.2 R47.2 S-RST.1 S-RST.2 S-SEL.1 S-SEL.2 S-START.1 S-START.2 S-VOL+.1 S-VOL+.2 S-VOL-.1 S-VOL-.2 U1.5 U1.11 U1.17 U1.24 U1.28 U1.30 U1.31 U1.36 U1.42 U1.46 U2.4 U$1.116 U$1.P$1 U$2.P$1 U$2.P$3 U$2.P$20 U$2.P$31 U$2.P$33 U$2.P$36 U$2.P$41 U$3.8 U$3.10 U$3.11 U$3.SHIELD1 U$3.SHIELD2 U$5.5 U$5.M1 U$5.M2 U$5.M3 U$5.M4 U$6.2 U$7.6 U$7.13 U$7.14 U$8.6 U$8.8 U$9.2 U$11.6 U$11.CD U$11.G1 U$11.G2 U$11.G3 U$11.G4 X2.5 X2.6
HP_COM [default]: C18.2 J-AUDIO.P4 R26.2 U$1.125
HP_COMFB [default]: R26.1 U$1.124
HP_L [default]: J-AUDIO.P3 U$1.121
HP_R [default]: J-AUDIO.P2 U$1.120
I2C0/SCL [default]: JP1.5 U$1.45
I2C0/SDA [default]: JP1.3 U$1.46
I2C1/SCL [default]: IC3.2 J4.3 J-CAM-FFC.19 JP1.26 JP10.3 JP12.11 R38.2 R44.2 U$1.9 U$7.12 U$8.10
I2C1/SDA [default]: IC3.1 J4.2 J-CAM-FFC.18 JP1.22 JP10.4 JP12.10 R39.2 R45.2 U$1.8 U$7.11 U$8.9
KEYADC0 [default]: C34.2 R20.2 R29.1 U$1.112
LCD_D19 [default]: J-LCD-FFC.8 JP12.14 U1.45 U$1.14
LCD_D20 [default]: J-LCD-FFC.9 JP12.13 U1.47 U$1.13
LCD_D21 [default]: J-LCD-FFC.10 JP12.12 U1.48 U$1.11
LCD_D22 [default]: J-LCD-FFC.11 JP12.9 U1.1 U$1.7
LCD_D23 [default]: J-LCD-FFC.12 JP12.8 U1.3 U$1.6
LINK_LED [default]: R53.1 U$1.77
MCSI-CK_N [default]: J4.8 U$1.87
MCSI-CK_P [default]: J4.7 U$1.86
MCSI-D0_N [default]: J4.14 U$1.82
MCSI-D0_P [default]: J4.13 U$1.81
MCSI-D1_N [default]: J4.11 U$1.84
MCSI-D1_P [default]: J4.10 U$1.83
MIC_HBIAS [default]: C17.1 R25.2 U$1.119
MIC_HBIAS_O [default]: J-AUDIO.P1 R25.1
MICIN1N [default]: C28.1 U$1.114
MICIN1P [default]: C27.1 U$1.113
MIPI-CSI-MCLK [default]: J4.5 JP1.15 U$1.10
N$1 [default]: R24.1 U$1.94
N$3 [default]: LED1.A R16.1
N$4 [default]: R19.1 U$2.P$23
N$5 [default]: C79.+ C80.1 D2.A IC3.32 IC3.33 L6.1 R4.2
N$6 [default]: LED2.A R17.1
N$7 [default]: R9.2 U$2.P$12
N$8 [default]: R20.1 R21.2 S-VOL+.3 S-VOL+.4
N$9 [default]: R46.1 U$9.4
N$10 [default]: D1.A L1.2 U$9.1
N$11 [default]: C77.1 U$7.9
N$12 [default]: R10.1 U$2.P$34
N$13 [default]: C4.1 C5.1 U$2.P$2
N$14 [default]: ANT1.2 C4.2 C6.1
N$15 [default]: C78.1 IC4.2 L6.2
N$16 [default]: C78.2 IC4.6
N$17 [default]: IC4.4 R4.1 R5.2
N$18 [default]: R53.2 U$3.9
N$19 [default]: C81.+ D3.C IC4.3 IC4.5
N$20 [default]: R52.2 U$3.12
N$21 [default]: C49.1 L2.2 R42.2 R43.2 U$3.4
N$22 [default]: C48.1 R40.2 R41.2 U$3.5
N$23 [default]: C7.1 U$1.97
N$24 [default]: IC3.23 R6.2
N$25 [default]: C83.1 IC3.26 IC3.27
N$26 [default]: JP5.2 U$1.98
N$27 [default]: C84.1 IC3.24
N$28 [default]: C22.1 C29.2 U$1.123
N$29 [default]: C10.1 Q2.2 U$1.95
N$30 [default]: C8.1 Q2.1 U$1.96
N$31 [default]: IC3.8 L7.2
N$32 [default]: C11.2 Q1.1 U$1.74
N$33 [default]: C12.2 Q1.2 U$1.75
N$34 [default]: IC3.15 L8.2
N$36 [default]: R12.1 U$1.73
N$37 [default]: C87.1 IC3.43 L9.2 R3.2
N$38 [default]: IC3.45 L9.1
N$39 [default]: C88.1 IC3.38 IC3.39 IC3.42 JP4.1 R3.1
N$40 [default]: IC3.47 PWR-ON.3
N$41 [default]: R21.1 R22.2 S-VOL-.3 S-VOL-.4
N$42 [default]: R22.1 R23.2 S-SEL.3 S-SEL.4
N$43 [default]: R23.1 S-START.3 S-START.4
N$44 [default]: C89.1 IC3.41
N$45 [default]: C90.1 IC3.11
N$46 [default]: IC3.4 PWR-RESET.3 R31.2
N$47 [default]: C18.1 R15.2
N$48 [default]: C23.2 C25.2 C27.2 MIC.2 R30.1
N$49 [default]: C24.2 C25.1 C28.2 MIC.1 R28.1
N$50 [default]: IC3.25 R18.2
N$51 [default]: IC2.5 L10.2
N$61 [default]: JP7.1 U$2.P$44
N$62 [default]: JP7.2 U$2.P$43
N$63 [default]: JP7.3 U$2.P$42
PB2 [default]: JP1.12 R17.2 U$1.41
PB3 [default]: J4.4 JP1.7 U$1.42
PB4/PWM0 [default]: JP1.13 U$1.43
PB5/PWM1 [default]: JP1.11 U$1.44
SDC0/CLK [default]: RN2.5 U$1.105 U$11.5
SDC0/CMD [default]: RN2.6 U$1.103 U$11.3
SDC0/D0 [default]: R1.1 U$1.106 U$11.7
SDC0/D1 [default]: R2.1 U$1.107 U$11.8
SDC0/D2 [default]: RN2.8 U$1.101 U$11.1
SDC0/D3 [default]: RN2.7 U$1.102 U$11.2
SDC1/CLK [default]: JP2.3 U$1.5 U$2.P$17
SDC1/CMD [default]: JP2.4 R36.2 U$1.4 U$2.P$16
SDC1/D0 [default]: JP2.2 RN1.5 U$1.3 U$2.P$18
SDC1/D1 [default]: JP2.1 RN1.6 U$1.2 U$2.P$19
SDC1/D2 [default]: JP2.6 RN1.7 U$1.1 U$2.P$14
SDC1/D3 [default]: JP2.5 RN1.8 U$1.128 U$2.P$15
SPD_LED [default]: R52.1 U$1.78
SPI1/CS [default]: JP1.24 R8.2 U2.1 U$1.54
SPI1/MISO [default]: JP1.21 U2.2 U$1.52
SPI1/MOSI [default]: JP1.19 U2.5 U$1.55
SPI1/SCK [default]: JP1.23 U2.6 U$1.53
SVREF [default]: C14.1 C15.2 R13.1 R14.2 U$1.63 U$1.71
TPX1 [default]: J-LCD-FFC.37 U$7.2 U$8.2 X2.1
TPX2 [default]: J-LCD-FFC.39 U$7.4 U$8.4 X2.3
TPY1 [default]: J-LCD-FFC.38 U$7.3 U$8.3 X2.2
TPY2 [default]: J-LCD-FFC.40 U$7.5 U$8.5 X2.4
UART0/RX [default]: JP1.10 U$1.49
UART0/TX [default]: JP1.8 U$1.48
UART2/RX/PB1 [default]: JP1.16 U$1.40
UART2/TX/PB0 [default]: JP1.18 U$1.39
USB/ID [default]: R32.2 U$1.100 U$5.4
USB_D_N [default]: J3.2 U$1.110 U$5.2
USB_D_P [default]: J3.3 U$1.111 U$5.3
V_INPUT [pwr]: D3.A J-PWR2.2 J-PWR.PWR
VBACKUP [pwr]: IC3.28
VCC-PE [pwr]: JP3.2 R44.1 R45.1 U$1.12 U$1.29
VDD [pwr]: C82.1 C94.1 IC2.1 IC2.3 IC3.7 IC3.14 IC3.21 IC3.29 IC3.34 IC3.35 IC3.44 PWR-RESET.1 R33.1 U$1.122
VLED+ [pwr]: C74.1 C75.1 D1.C J-LCD-FFC.2 J-VLED.1 U$9.5
VLED- [pwr]: J-LCD-FFC.1 J-VLED.2 R47.1 U$9.3
VRA1 [default]: C21.2 U$1.117
VRA2 [default]: C20.2 R27.2 U$1.118
WL_H_WK [default]: U$2.P$13
Y0_N [default]: J-LVDS.7 U1.41
Y0_P [default]: J-LVDS.8 U1.40
Y1_N [default]: J-LVDS.9 U1.39
Y1_P [default]: J-LVDS.10 U1.38
Y2_N [default]: J-LVDS.11 U1.35
Y2_P [default]: J-LVDS.12 U1.34

## Tracks (layer width: path | path; a pad name or v marks a point on that pad's centre or on a via)
!IRQ  (via drill 0.3 pad 0.5)
  TOP 0.152: v74.76,13.59 73.42,12.75 arc-22 73.18,12.66 70.06,12.1 arc6 69.9,12.06 68.68,11.71 arc9 68.43,11.62 68.37,11.59 arc58 67.46,10.32 67.45,10.25 arc7 67.44,10.06 67.44,10.03 arc6 67.45,9.86 67.58,8.53 arc0 67.58,8.52 67.62,8.17 arc9 67.66,7.96 v67.81,7.42
  BOTTOM 0.152: v67.81,7.42 69.95,7.42 70.03,7.42 IC3.48 | R33.2 81.52,12.19 81.45,12.19 arc-31 81.41,12.2 80.05,13.03 arc30 79.66,13.15 77.96,13.19 arc-3 77.94,13.19 77.81,13.2 arc-6 77.78,13.2 77.42,13.27 arc10 77.27,13.28 77.26,13.28 77.2,13.28 arc1 77.18,13.28 77.14,13.28 75.59,13.28 75.55,13.28 arc1 75.53,13.28 75.47,13.28 arc-27 75.32,13.32 v74.76,13.59
!RESET  (via drill 0.3 pad 0.5)
  TOP 0.152: v37.18,1.26 38,1.59 arc-23 38.03,1.6 38.11,1.6 S-RST.3 38.41,2.97 38.41,3.05 38.41,7.11 38.41,7.19 S-RST.4 | v27.27,29.39 v27.74,30.78 31.77,32.4 arc22 31.79,32.42 31.85,32.47 U$1.99
  BOTTOM 0.152: v37.18,1.26 37.18,1.66 37.18,1.74 R18.1 36.45,2.68 36.45,2.76 arc39 36.43,2.81 27.55,13.89 arc-27 27.39,14.24 26.77,17.17 arc-5 26.76,17.21 25.92,23.79 arc-22 25.93,23.88 26.82,27.34 arc2 26.83,27.36 v27.27,29.39 | C13.1 27.69,33.45 27.75,33.39 27.75,33.39 arc-27 27.76,33.36 28.04,32.36 arc27 28.06,32.33 28.11,32.27 R11.1 28.07,31.11 28.02,31.06 v27.74,30.78
+1V2  (via drill 0.3 pad 0.5)
  TOP 0.178: U$1.51 45.67,40.04 45.49,39.82 | U$1.26 49.06,32.4 49.02,32.41 arc14 49,32.42 48.87,32.43 arc30 48.75,32.41 48.62,32.34 48.68,32.25 arc12 48.77,32.13 48.77,32.12 48.78,32.12 U$1.25 | U$1.108 35.49,30.99 35.5,31 v35.78,31.31 | U$1.20 47.37,30.7 47.35,30.75 47.3,30.95 arc-38 v47.32,31.23 | v47.32,31.23 v47.32,31.23 arc102 47.01,30.56 47.08,30.42 U$1.19 | U$1.88 34.64,37.21 34.64,37.2 34.65,37.2 34.65,37.2 arc6 34.68,37.18 v35.03,36.9 | U$1.56 44.26,41.45 44.25,41.45 arc59 44.18,41.16 44.32,40.64 arc-38 44.3,40.42 44.3,40.41 | 46.59,38.7 46.8,38.91 U$1.47 | U$1.21 47.65,30.99 47.64,30.99 arc7 47.59,31.03 v47.32,31.23 | U$1.126 40.58,25.89 40.58,25.9 arc20 40.66,26.01 v40.98,26.74 | U$1.64 42.97,44.71 42.91,44.77 v42.62,45.06 | U$1.80 36.9,39.47 37,39.4 arc8 37.08,39.35 v38.49,38.62 | U$1.38 49.35,36.36 49.34,36.36 49.34,36.35 49.34,36.35 arc-47 49.06,36.25 47.93,36.32 | U$1.58 43.69,42.02 43.68,41.98 arc14 43.67,41.95 43.66,41.83 arc17 43.67,41.76 43.81,41.1 arc7 43.83,41.02 v43.98,40.55
  TOP 0.254: C55.1 49.43,28.39 49.34,28.48 v49.06,28.76 | 43.92,40.01 45.49,39.82 45.88,39.23 arc11 45.94,39.17 46,39.1 arc11 46.07,39.05 46.59,38.7 47.93,36.32 v40.98,26.74 | 48.62,32.34 48.06,31.98 arc12 47.98,31.93 47.84,31.78 arc2 47.84,31.77 v47.32,31.23 | v38.49,38.62 43.92,40.01 | L7.1 69.19,13.91 69.06,13.91 v68.67,13.91 | v43.98,40.55 44.3,40.41 44.29,40.41 arc-20 44.22,40.31 43.92,40.01
  BOTTOM 0.178: IC3.10 74.95,8.8 74.88,9.23
  BOTTOM 0.254: C62.1 37.35,31.03 37.26,30.94 37.25,30.94 arc7 37.24,30.93 37.09,30.71 | C52.1 47.51,43.69 47.6,43.59 48.2,42.99 48.29,42.9 C53.1 48.5,42.07 48.59,41.98 48.6,41.97 51.3,39.01 51.39,38.92 C64.1 51.32,37.8 51.41,37.7 51.41,37.7 arc-48 51.45,37.6 51.35,36.56 arc21 51.37,36.31 52.72,31.49 | v38.49,38.62 38.21,38.34 38.12,38.25 C66.1 37.02,37.58 36.93,37.49 36.56,37.12 arc-44 36.2,36.96 35.92,36.96 35.91,36.95 v35.03,36.9 | v43.98,40.55 46.86,43.43 46.95,43.52 C52.1 | C65.1 44.79,30.32 44.88,30.41 45.44,30.97 45.53,31.06 C54.1 46.75,31.61 46.84,31.52 46.84,31.52 arc13 46.86,31.5 v47.32,31.23 | v35.78,31.31 37.09,30.71 | 37.09,30.71 37.14,30.66 arc5 37.15,30.65 38.44,29.43 40.12,27.84 arc10 40.16,27.81 40.43,27.63 arc-31 40.67,27.36 40.77,27.14 40.78,27.13 v40.98,26.74 41.26,27.02 41.35,27.11 C56.1 | v42.62,45.06 46.11,44.33 arc-31 46.17,44.3 46.26,44.21 C52.1 | JP12.4 69.6,27.44 arc18 69.49,27.15 69.49,27.13 arc-25 69.14,26.37 68.07,24.98 | 52.72,31.49 49.74,28.51 49.65,28.42 C67.1 49.44,28.38 49.35,28.46 v49.06,28.76 v47.32,31.23 | 74.88,9.23 74.62,9.68 arc21 74.39,9.95 74.37,9.96 arc-42 74.03,10.56 73.79,12.02 arc-9 73.79,12.04 73.79,12.16 C86.1 72.24,12.16 72.11,12.16 arc24 72.06,12.15 71.4,11.86 arc-24 71.29,11.84 69.49,11.84 arc-73 69.22,12.04 v68.67,13.91 67.56,16.83 arc-21 67.55,16.93 67.55,17.93 arc-60 67.69,18.17 68.93,18.89 arc15 69.11,19.03 69.25,19.16 arc11 69.36,19.3 69.58,19.64 arc34 69.72,20.08 69.72,20.75 arc22 69.66,21.04 68.07,24.98 | v47.32,31.23 47.5,31.91 arc58 47.47,32.03 47.38,32.12 C63.1 | 68.07,24.98 66.21,25.21 arc-5 66.05,25.24 64.81,25.5 arc-65 63.3,26.97 63.3,27 arc11 63.22,27.22 62.45,28.97 arc21 62.36,29.1 62,29.47 arc37 61.76,29.59 61.66,29.6 arc8 61.62,29.6 60.98,29.6 arc-12 60.85,29.62 59.33,29.94 arc12 59.16,29.96 59.08,29.96
  BOTTOM 0.254: 59.08,29.96 | 59.08,29.96 58.44,29.96 arc-15 58.37,29.97 52.72,31.49
+1V8  (via drill 0.3 pad 0.5)
  TOP 0.178: 42.67,42.65 42.84,42.87 U$1.61 | U$1.65 41.14,43.71 v41.44,43.29 | U$1.72 38.03,42.87 38.03,42.87 arc-2 38.01,42.89 38.01,42.89 arc-58 37.83,43.64 v38.2,45 | U$1.68 40.3,42.87 40.34,42.85 arc14 40.36,42.85 40.49,42.84 arc7 40.52,42.84 40.66,42.84 40.6,43.1 40.59,43.11 40.58,43.15 U$1.67 40.02,43.72 40.08,43.78 40.23,43.93 40.29,43.99 U$1.66 | U$1.60 43.12,42.58 43.12,42.58 arc12 43.06,42.49 42.97,42.35 43.09,42.29 arc30 43.21,42.27 43.34,42.28 arc14 43.37,42.29 43.41,42.3 U$1.59 | U$1.62 42.56,43.15 42.4,42.92 | U$1.70 39.73,42.3 39.77,42.29 arc14 39.79,42.28 39.92,42.27 arc28 40.04,42.29 40.34,42.42 40.01,42.58 U$1.69 | U$1.79 37.18,39.75 37.19,39.75 37.19,39.75 arc66 37.59,39.67 37.81,39.76
  TOP 0.254: v38.2,45 37.89,46.69 arc-10 37.88,46.8 37.83,52.07 arc3 37.83,52.1 v37.77,52.91 36.84,53.71 arc52 35.91,53.95 14.87,49.7 arc32 14.35,49.43 12.94,48.12 arc60 12.66,47.17 14.18,40.81 arc18 14.29,40.53 19.26,32.44 arc-32 19.28,32.37 19.28,32.24 L10.1 19.28,28.5 19.28,28.37 arc-19 19.28,28.33 18.38,25.79 | 40.89,42.65 40.66,42.84 | 37.81,39.76 39.82,41.79 arc6 39.85,41.82 40.34,42.42 40.75,42.55 arc32 40.89,42.64 40.89,42.65 | 40.89,42.65 v41.44,43.29 42.4,42.92 42.4,42.91 arc9 42.43,42.88 42.57,42.74 42.58,42.73 42.67,42.65 42.71,42.6 42.86,42.46 42.86,42.45 42.97,42.35 | v19.48,25.69 19.48,25.29 19.48,25.16 C93.1 18.77,25.16 18.77,25.29 arc41 18.74,25.37 18.38,25.79 | IC2.4 16.91,25.54 17.04,25.54 arc11 17.06,25.54 18.38,25.79
  BOTTOM 0.254: 40.97,44.42 40.14,44.64 arc15 40.11,44.65 39.98,44.65 C51.1 39.24,45 39.11,45 v38.2,45 | R13.2 40.44,53.58 40.31,53.58 39.17,53.58 39.04,53.58 C14.2 38.3,53.16 38.17,53.16 arc36 38.1,53.14 v37.77,52.91 | C50.1 41.46,42.89 | 41.46,42.89 41.37,42.98 | 41.37,42.98 41.37,42.98 arc-69 41.13,43.25 40.97,44.42 | JP12.6 69.5,30.21 arc43 68.9,29.22 68.57,27.36 arc-39 68.26,26.81 67.75,26.37 arc-48 66.99,26.13 66.34,26.21 arc-4 66.27,26.22 65.03,26.46 arc-66 64.26,27.2 64.26,27.22 arc10 64.14,27.59 63.38,29.36 63.38,29.37 62.45,31.51 arc22 62.36,31.64 62,32.01 arc37 61.76,32.13 61.66,32.14 arc8 61.62,32.14 60.98,32.14 arc-10 60.87,32.15 59.28,32.43 arc2 59.26,32.43 59.16,32.44 arc8 59.08,32.45 58.44,32.45 arc-24 58.3,32.48 58.2,32.52 arc-17 58.1,32.58 53.13,36.78 arc10 53,36.87 52.99,36.87 arc-37 52.75,37.15 52.5,37.76 arc-14 52.45,37.92 52.37,38.43 arc34 52.3,38.58 51.61,39.33 arc-12 51.57,39.38 49.52,42.81 arc12 49.49,42.85 48.79,43.61 arc-4 48.78,43.62 48.28,44.24 arc6 48.26,44.26 47.2,45.32 arc5 47.18,45.34 45.95,46.37 45.95,46.38 45.86,46.47 C38.2 45.02,46.69 44.93,46.78 44.23,47.47 44.14,47.56 C47.1 43.81,47.26 43.72,47.17 40.97,44.42 | C50.1 41.46,42.89 | 41.46,42.89 41.37,42.98 | 41.37,42.98 41.37,42.98 arc-72 41.35,43.13 v41.44,43.29 | C92.1 19.48,24.76 19.48,24.89 v19.48,25.69 | C39.1 42.6,40.95 42.51,41.04 42.03,41.51 41.94,41.6 C50.1
+2V5
  TOP 0.254: U$6.5 70.7,18.34 70.7,18.46 70.7,19.65 70.7,19.78 JP3.1
  BOTTOM 0.254: JP3.1 70.4,19.78 70.4,19.65 70.4,17.93 70.4,17.8 C76.1
+3V3  (via drill 0.3 pad 0.5)
  TOP 0.178: RN2.3 23.72,26.86 23.66,26.92 23.45,27.13 23.39,27.19 RN2.2 23.16,27.42 23.1,27.48 22.87,27.71 22.8,27.78 RN2.1 | U$1.93 33.23,35.8 33.23,35.79 33.23,35.79 arc3 33.25,35.77 v33.71,35.38 | RN1.4 45.79,22.14 45.73,22.08 45.5,21.85 45.44,21.79 RN1.3 | U$1.57 45.1,42.87 45.12,42.91 arc14 45.12,42.93 45.13,43.06 arc6 45.13,43.08 45.13,43.22 | U$1.104 34.36,32.12 34.58,32.33 35.97,31.76 arc-124 36.05,30.9 35.83,30.75 arc10 35.78,30.71 35.77,30.71 35.77,30.7 U$1.109 | R38.1 83.43,46.25 83.43,46.34 arc24 83.42,46.38 82.74,47.91 82.74,48 R39.1 | U$1.85 35.49,38.06 35.7,37.84 | v47.37,41.36 47.08,40.89 U$1.50 | U$8.1 91.52,45.72 91.61,45.72 arc-30 91.66,45.7 95.02,43.74 arc-2 95.04,43.72 95.6,43.37 arc-148 95.31,42.36 94.7,42.36 94.69,42.36 93.75,42.37 arc-21 93.51,42.41 v90.35,43.67 | U$1.127 39.73,24.48 | 39.73,24.48 | 39.73,24.48 39.72,24.47 arc73 39.67,24.03 39.69,23.99 arc16 39.76,23.91 39.81,23.85 arc48 40.11,23.74 v40.83,23.78
  TOP 0.254: U$6.3 67.61,16.44 67.49,16.44 arc-53 67.38,16.49 66.52,17.62 arc53 66.42,17.67 66.29,17.67 C31.1 | 72.5,48.69 v76.11,50.57 75.4,52.67 | C9.1 19.18,17.07 19.31,17.07 v19.71,17.07 25.68,23.86 | 83.56,51.33 82.75,49.06 arc20 82.74,49.02 82.74,48.89 R39.1 | 72.5,48.69 72.65,48.44 arc-12 72.68,48.36 72.69,48.34 arc-19 72.71,48.22 U1.8 | JP12.7 73.74,32.34 arc-149 73.52,31.05 JP12.5 70.95,30.08 arc-28 70.49,29.95 66.36,29.86 arc1 66.34,29.86 65.65,29.83 arc38 64.44,29.37 63.93,28.95 arc8 63.72,28.75 61.97,26.79 arc42 61.94,26.71 61.94,26.58 JP10.1 60.67,26.58 60.54,26.58 arc-16 60.5,26.59 59.15,26.98 arc16 59.08,26.99 58.44,26.99 arc-45 57.93,27.21 57.48,27.65 arc-45 57.27,28.17 57.27,28.8 arc-7 57.27,28.89 57.57,31.39 arc-38 57.7,31.64 58.14,32.09 arc-32 58.35,32.2 59.17,32.39 arc32 59.38,32.5 59.82,32.95 arc32 59.94,33.16 60.12,33.98 arc-32 60.24,34.18 60.68,34.63 arc-32 60.89,34.74 61.71,34.93 arc32 61.92,35.04 62.36,35.49 arc42 62.49,35.77 62.9,43.37 arc3 62.9,43.41 62.9,44.04 arc45 62.65,44.63 62.21,45.08 arc10 62.09,45.17 61.62,45.51 61.62,45.63 JP10.17 | U2.3 51.94,50.92 51.81,50.92 51.8,50.91 v50.81,50.87 | C31.1 66.29,18.52 66.29,18.64 arc-27 66.31,18.7 66.42,18.92 | v66.42,6.1 66.42,6.11 arc-30 66.91,6.32 67.95,6.48 arc117 68.57,7.98 | 68.57,7.98 | 68.57,7.98 arc-18 68.49,8.15 68.47,8.22 arc-14 68.44,8.37 68.42,8.64 68.42,8.65 68.34,9.98 arc-3 68.34,10.02 68.34,10.05 arc-3 68.34,10.1 68.34,10.17 arc-71 68.86,10.82 70.16,11.19 arc-29 70.49,11.19 73.62,10.47 arc-6 73.69,10.45 75,10 | v90.35,43.67 89.49,44.64 arc-23 89.2,45.17 89,45.78 arc-56 89.21,46.95 89.22,46.96 arc38 89.35,47.36 89.35,48.76 89.35,48.89 C2.1 90.17,49.63 90.17,49.76 arc-7 90.17,49.78 90.54,52.73 arc87 89.74,53.82 89.39,53.88 arc-19 89.08,53.99 X2.7
  TOP 0.254: v56.96,12.26 58.61,12.21 58.74,12.21 U$2.P$9 60.29,12.21 60.41,12.21 arc61 60.52,12.28 62.16,15.27 arc-25 62.28,15.41 65.35,17.64 arc-36 65.42,17.67 65.55,17.67 C31.1 | 79.65,56.09 79.36,56.1 79.07,56.1 arc47 78.86,56.01 78.76,55.91 arc15 78.75,55.88 78.71,55.82 U1.29 78.71,54.32 78.68,54.26 arc-15 78.66,54.23 78.56,54.13 arc-13 78.51,54.09 77.82,53.63 arc-7 77.73,53.57 76.49,52.96 arc-12 76.39,52.92 75.4,52.67 | 34.16,35.12 v33.71,35.38 32.64,34.62 arc-26 32.47,34.55 32.37,34.53 arc-33 32.17,34.55 24.38,37.85 arc23 24.33,37.86 24.21,37.86 JP5.1 22.94,37.86 22.94,37.73 arc-22 22.93,37.68 22.42,36.43 arc20 22.38,36.29 22.04,29 arc48 22.24,28.49 22.51,28.21 22.6,28.12 RN2.1 | U1.37 74.71,54.32 74.75,54.14 arc12 74.81,53.98 75.4,52.67 | 25.68,23.86 25.49,24.43 arc24 25.46,24.48 25.37,24.57 R1.2 25.06,25.46 24.97,25.55 24.64,25.88 24.55,25.97 RN2.4 24.33,26.25 24.24,26.34 24.01,26.57 23.92,26.66 RN2.3 | L8.1 75.78,8.59 75.78,8.46 75.75,8.19 | JP1.1 34.47,58.88 34.47,58.75 arc51 34.51,58.65 35.41,57.94 arc7 35.51,57.86 44.19,52.55 | U1.27 79.71,55.82 79.65,56.09 | 34.16,35.12 35.43,36.55 arc33 35.55,36.83 35.66,37.57 arc-2 35.66,37.59 35.7,37.77 arc8 35.7,37.83 35.7,37.84 35.87,37.92 arc6 35.9,37.94 35.91,37.95 arc-6 35.96,37.97 35.97,37.98 arc10 36.03,38.01 v36.69,38.48 | 34.58,32.33 34.16,35.12 | 66.42,18.92 65.95,19.65 65.95,19.78 JP3.3 66.29,20.66 66.38,20.75 67.73,21.42 arc-27 67.86,21.45 71.48,21.45 arc-18 71.56,21.44 75.42,20.16 | R2.2 26.26,23.91 26.17,23.82 26.17,23.82 arc-54 26.06,23.79 25.68,23.86 | J-CAM-FFC.2 92.77,28.45 92.64,28.45 arc30 92.58,28.43 v91.34,27.72 80.37,24.44 arc25 80,24.24 75.42,20.16
  TOP 0.254: U2.7 46.16,49.65 46.16,49.52 46.16,48.86 46.16,48.73 U2.8 46.88,48.38 46.88,48.25 arc46 46.92,48.16 48.28,46.82 arc-46 48.32,46.73 48.32,46.6 R8.1 49.07,46.6 49.07,46.73 arc-30 49.09,46.8 49.26,47.1 arc-8 49.32,47.18 51.24,49.66 arc88 51.14,50.6 v50.81,50.87 | U$6.1 67.61,18.34 67.49,18.34 arc-32 67.42,18.36 66.57,18.88 arc32 66.42,18.92 | 66.42,18.92 | U1.2 69.71,48.22 arc-19 69.73,48.34 69.74,48.36 arc-70 70.14,48.65 72.5,48.69 | U$2.P$22 48.18,16.86 48.18,16.99 arc53 48.13,17.09 v44.53,19.76 44.31,20.07 arc7 44.3,20.08 44.21,20.17 RN1.1 44.26,20.61 44.35,20.7 44.58,20.93 44.67,21.02 RN1.2 44.84,21.19 44.93,21.28 45.14,21.5 45.23,21.59 RN1.3 | 83.56,51.33 82.82,52.21 arc-19 82.65,52.48 81.25,55.98 arc68 80.86,56.25 80.07,56.25 arc26 79.88,56.2 79.65,56.09 | 75.75,8.19 v77.33,7.77 | U1.21 79.21,46.72 v79.21,46.3 | X2.8 86.21,51.92 arc-24 85.77,51.74 83.56,51.33 | 75.75,8.19 75.66,8.18 arc-78 75.38,8.4 75,10 | 75,10 75.34,10.33 arc50 75.51,10.75 75.33,13.44 arc-4 75.33,13.46 arc-2 75.33,13.48 75.33,13.56 arc7 75.33,13.64 75.23,14.78 arc-5 75.22,14.82 75.22,15.26 arc-8 75.23,15.32 75.67,18.59 arc19 75.66,18.99 75.42,20.16 | 44.19,52.55 45.1,53.04 arc-28 45.31,53.09 47.01,53.09 arc-31 47.23,53.03 v50.81,50.87 | 45.13,43.22 44.15,48.01 arc-12 44.12,48.25 44.12,50.13 arc-2 44.12,50.16 44.19,52.55
  BOTTOM 0.178: IC3.13 77.07,7.42 77.07,7.5 arc-50 77.1,7.57 v77.33,7.77 77.73,7.58 arc-50 78,7.26 78.17,6.64 arc-101 77.6,5.84 77.15,5.8 IC3.17 | J-LCD-FFC.31 91.86,27.72 91.77,27.72 v91.34,27.72 | J-LCD-FFC.4 91.86,41.28 91.77,41.28 arc-42 91.71,41.31 91.26,41.7 arc-19 91.19,41.8 90.82,42.45 arc-9 90.77,42.56 v90.35,43.67 | IC3.40 69.95,4.21 arc56 69.64,4.04 69.53,3.87
  BOTTOM 0.254: 69.53,3.87 68.89,4.1 arc-21 68.33,4.43 v66.42,6.1 | R11.2 29.66,32.56 29.75,32.47 30.45,31.77 30.54,31.68 R32.1 30.82,31.95 30.91,32.04 30.91,32.05 arc22 30.94,32.09 32.2,35.35 arc64 32.17,35.49 32.08,35.58 C69.1 32.79,36.3 32.88,36.21 v33.71,35.38 34.17,34.92 34.26,34.83 C58.1 34.96,34.48 35.05,34.39 35.63,33.81 35.72,33.72 C59.1 36.96,33.19 37.05,33.1 38.32,31.83 arc-5 38.34,31.81 39.01,31.01 39.02,31 39.11,30.91 C60.1 39.27,30.01 39.36,29.92 40.07,29.21 40.16,29.12 C57.1 40.91,28.82 41,28.73 41.01,28.73 arc18 41.04,28.7 41.92,28.29 arc-20 42,28.24 42.71,27.53 arc-74 42.75,27.19 v40.83,23.78 42.34,21.98 arc5 42.38,21.94 v44.53,19.76 47.97,12.8 arc-26 47.98,12.74 47.98,12.62 C30.1 | C30.1 49.03,12.62 49.15,12.62 arc43 49.24,12.65 49.56,12.95 arc-10 49.6,12.98 52.18,14.65 | C33.1 73.54,53.44 73.67,53.44 74.62,53.44 74.75,53.44 C32.1 | R19.2 43.36,11.72 43.48,11.72 47.85,11.72 47.98,11.72 C30.1 | X2.7 X2.8 86.16,51.94 arc-26 85.7,51.77 v76.11,50.57 72.16,50.67 arc-89 71.89,50.95 71.89,52.25 arc-43 71.96,52.44 72.26,52.76 arc43 72.29,52.85 72.29,52.97 C33.1 | R36.1 52.15,15.36 52.15,15.23 52.18,14.65 | C33.1 72.29,54.02 72.29,54.15 arc12 72.29,54.17 J-LVDS.3 69.83,59.88 69.71,59.88 J-LVDS.1 69.12,60.46 69.12,60.59 J-LVDS.2 | v56.96,12.26 55.86,12.13 arc36 55.7,12.06 55.38,11.76 arc-43 55.29,11.73 55.16,11.73 C3.1 54.58,11.73 54.58,11.85 54.58,12.76 54.58,12.88 R9.1 54.15,13.73 54.03,13.73 arc-27 53.97,13.74 52.18,14.65 | JP1.17 53.84,58.88 53.84,58.75 51.48,52.88 arc-20 51.38,52.73 51.05,52.35 arc42 51.02,52.27 51.02,52.14 C1.1 50.81,51.4 50.81,51.27 v50.81,50.87 50.42,50.69 arc104 50.18,49.65 52.07,47.32 arc53 52.62,47.07 58.43,47.31 arc-2 58.44,47.31 59.08,47.31 arc-27 59.2,47.28 60.55,46.6 60.56,46.6 60.65,46.51 JP10.17 61.94,46.58 62.06,46.58 76.54,47.33 arc-26 77.02,47.24 v79.21,46.3 82.05,46.07 arc2 82.08,46.07 86.24,45.88 86.25,45.88 86.37,45.88 U$7.1 87.11,45.83 87.24,45.83 arc-35 87.31,45.8 v90.35,43.67
  BOTTOM 0.254: R10.2 48.84,8.57 48.84,8.7 48.84,11.24 48.84,11.37 C30.1 | v47.37,41.36 45.94,38.52 arc-16 45.92,38.49 45.92,38.48 45.83,38.4 C70.1 45.48,38.04 45.39,38.13 44.83,38.69 44.74,38.78 C61.1 43.44,39.24 43.35,39.33 43.35,39.33 arc18 43.31,39.35 42.67,39.65 arc-19 42.6,39.71 40.32,41.92 arc89 39.92,41.92 39,41 arc2 38.99,40.99 v36.69,38.48 | J4.1 12.24,57.59 12.24,57.46 arc9 12.24,57.44 13.1,52.16 arc-54 12.73,51.01 12.43,50.71 arc22 12.34,50.57 12.25,50.36 arc-67 12.13,50.28 12,50.28 L2.1 12,49.03 12.13,49.03 arc-67 12.25,48.96 12.34,48.74 arc44 12.56,48.52 13.85,47.96 arc-26 14.07,47.8 14.08,47.79 arc30 14.65,47.4 15.44,47.12 arc-57 16.13,46.36 16.58,44.58 arc44 17.06,43.92 18.19,43.22 arc-8 18.31,43.14 22.89,39.35 arc-50 22.94,39.25 22.94,39.13 JP5.1 | JP10.1 61.94,25.31 61.94,25.18 arc40 61.97,25.1 65.32,21.17 65.32,21.05 JP3.3 | U$11.4 18.62,15.6 18.62,15.73 arc-40 18.65,15.81 v19.71,17.07 | C85.1 71.16,13.59 71.29,13.59 arc24 71.34,13.6 72,13.89 arc-24 72.11,13.92 73.79,13.92 73.91,13.92 arc-93 74.19,13.62 74.19,13.62 arc76 74.6,13.04 75.23,12.85 arc17 75.47,12.81 75.54,12.81 75.59,12.81 77.14,12.81 77.15,12.81 77.19,12.81 77.26,12.81 77.27,12.81 arc-15 77.37,12.8 77.62,12.73 arc7 77.72,12.71 77.84,12.69 arc7 77.95,12.69 79.65,12.64 arc-89 79.92,12.37 79.92,10.77 arc-42 79.85,10.58 v77.33,7.77
+3V3A  (via drill 0.3 pad 0.5)
  TOP 0.178: v35.64,26.99 36.34,27.88 U$1.115 37.47,29.01 37.47,29.01 arc55 37.57,29.35 37.53,29.55 | C72.1 36.03,42.6 36.1,42.54 36.9,41.73 U$1.76
  TOP 0.254: C72.1 35.51,42.64 35.42,42.55 v34.91,42.05 | v35.64,26.99 31.84,22.49 arc54 31.7,21.89 v33.01,16.41 33.25,16.09 arc-37 33.27,16.02 33.27,15.89 C26.2 34.02,15.04 34.02,14.92 arc43 34.05,14.83 34.35,14.51 arc-3 34.36,14.49 39.01,8.81 arc-16 39.05,8.75 41.73,2.49 arc52 42.45,1.87 47.72,0.5 arc15 48.06,0.46 49.53,0.46 | 37.53,29.55 v36.18,37.49 | v74.98,10.71 70.55,11.6 arc27 70.05,11.58 68.75,11.21 arc71 67.94,10.2 67.93,10.12 arc3 67.93,10.06 67.93,10.03 arc4 67.93,9.95 68.02,8.62 68.03,8.34 arc14 68.08,8.1 68.1,8.03 arc18 68.24,7.75 68.25,7.74 arc-117 67.88,6.88 66.86,6.74 arc4 66.77,6.72 66.31,6.62 arc25 66.1,6.53 63.17,4.32 arc-9 63.13,4.3 61.8,3.6 arc1 61.78,3.59 57.77,1.41 arc-8 57.71,1.39 56.95,1.1 56.94,1.1 56.15,0.82 arc-1 56.13,0.81 55.3,0.53 arc-19 54.87,0.46 54.36,0.46 | 54.36,0.46 | 54.36,0.46 53.45,0.46 | 53.45,0.46 | 53.45,0.46 50.82,0.46 | 50.82,0.46 | 50.82,0.46 50.37,0.46 49.86,0.46 49.53,0.46 | 49.53,0.46
  BOTTOM 0.178: 75.93,9.8 75.84,9.1 arc-18 75.76,8.81 75.75,8.8 IC3.12
  BOTTOM 0.254: v33.01,16.41 33.14,16.06 arc-20 33.15,16.01 33.15,15.88 R30.2 | C71.1 35.29,42.42 35.2,42.33 v34.91,42.05 v36.18,37.49 | v74.98,10.71 v74.99,10.7 arc-6 75.13,10.58 75.93,9.8 77.43,10.43 arc45 77.66,10.66 77.72,10.81 arc-67 77.84,10.89 77.97,10.89 C91.1 | C19.2 28.45,24.89 28.54,24.8 29.18,24.17 29.27,24.08 C16.2 30.62,23.66 30.71,23.75 30.71,23.76 arc-6 30.72,23.77 32.13,24.82 arc-35 32.29,24.88 32.73,24.89 arc41 32.81,24.93 32.9,25.02 C68.1 33.73,25.39 33.82,25.48 34.43,26.09 34.52,26.18 R29.2 35.27,26.62 35.36,26.71 v35.64,26.99
+5V  (via drill 0.3 pad 0.5)
  TOP 0.254: v73.35,1.3 76.19,1.18 arc45 76.67,1.36 78.72,3.24 arc-11 78.86,3.34 81.1,4.7 arc49 81.23,4.89 81.53,6.61 arc-56 81.78,6.93 83.61,7.75 | 83.61,7.75 83.91,10.57 84.46,16.82 arc5 84.46,16.83 84.46,16.96 C73.1 85.51,18.21 85.64,18.21 arc60 85.75,18.27 86.39,19.37 arc30 86.4,19.44 86.4,19.57 U$9.6 86.7,20.31 86.83,20.31 arc11 86.85,20.31 v88.44,20.63 92.75,27.75 arc31 92.77,27.82 92.77,27.95 J-CAM-FFC.1 93.31,27.95 93.44,27.95 arc-60 93.55,27.88 93.72,27.6 arc92 94.66,27.37 95.6,27.97 arc38 95.88,28.31 97.27,32.17 arc20 97.39,32.92 97.39,46.76 97.39,46.89 R16.2 97.72,47.63 97.85,47.63 arc30 97.91,47.65 98.21,47.83 arc59 98.58,48.45 98.62,52.4 98.62,52.41 98.62,53.61 | D2.C 80.99,2.46 81.11,2.46 arc30 81.18,2.48 84.77,4.57 arc60 84.98,4.94 84.98,6.54 arc54 84.8,6.88 83.61,7.75 | J3.1 13.1,36.26 arc13 13.11,36.57 12.23,47.29 arc-52 12.66,48.41 14.07,49.73 arc-12 14.33,49.92 33.51,61.28 33.51,61.29 33.52,61.29 33.52,61.41 JP1.2 | 98.62,53.61 | 98.62,53.61 98.62,54.25 | 98.62,54.25 | 98.62,54.25 98.62,54.34 | 98.62,54.34 | 98.62,54.34 98.62,54.55 arc-3 98.62,54.58 98.63,54.75 arc4 98.63,54.82 98.62,55.19 arc33 98.49,55.58 97.97,56.32 arc10 97.87,56.44 97.78,56.53 arc12 97.63,56.65 95.9,57.75 arc13 95.82,57.79 94.43,58.28 arc-3 94.37,58.3 93.44,58.69 arc-9 93.28,58.77 85.95,63.24 arc29 85.18,63.47 64.68,64.24 arc2 64.63,64.25 58.92,64.25 arc2 58.88,64.25 38.57,63.69 arc43 37.97,63.43 37.53,62.99 arc15 37.39,62.81 37.13,62.37 37.01,62.37 JP1.4
  BOTTOM 0.178: IC3.31 73.35,1.6 v73.35,1.3